# Altium PCB MPD-200A.PcbDoc
Units mm, origin at the board's own origin, x right, y up, seen from the top; angles counter-clockwise.
Board outline 30 x 30 mm, 2 copper layers (Top Layer, Bottom Layer), stack 1.071 mm thick; 7 components, 0 nets, 30 pads, 0 vias.
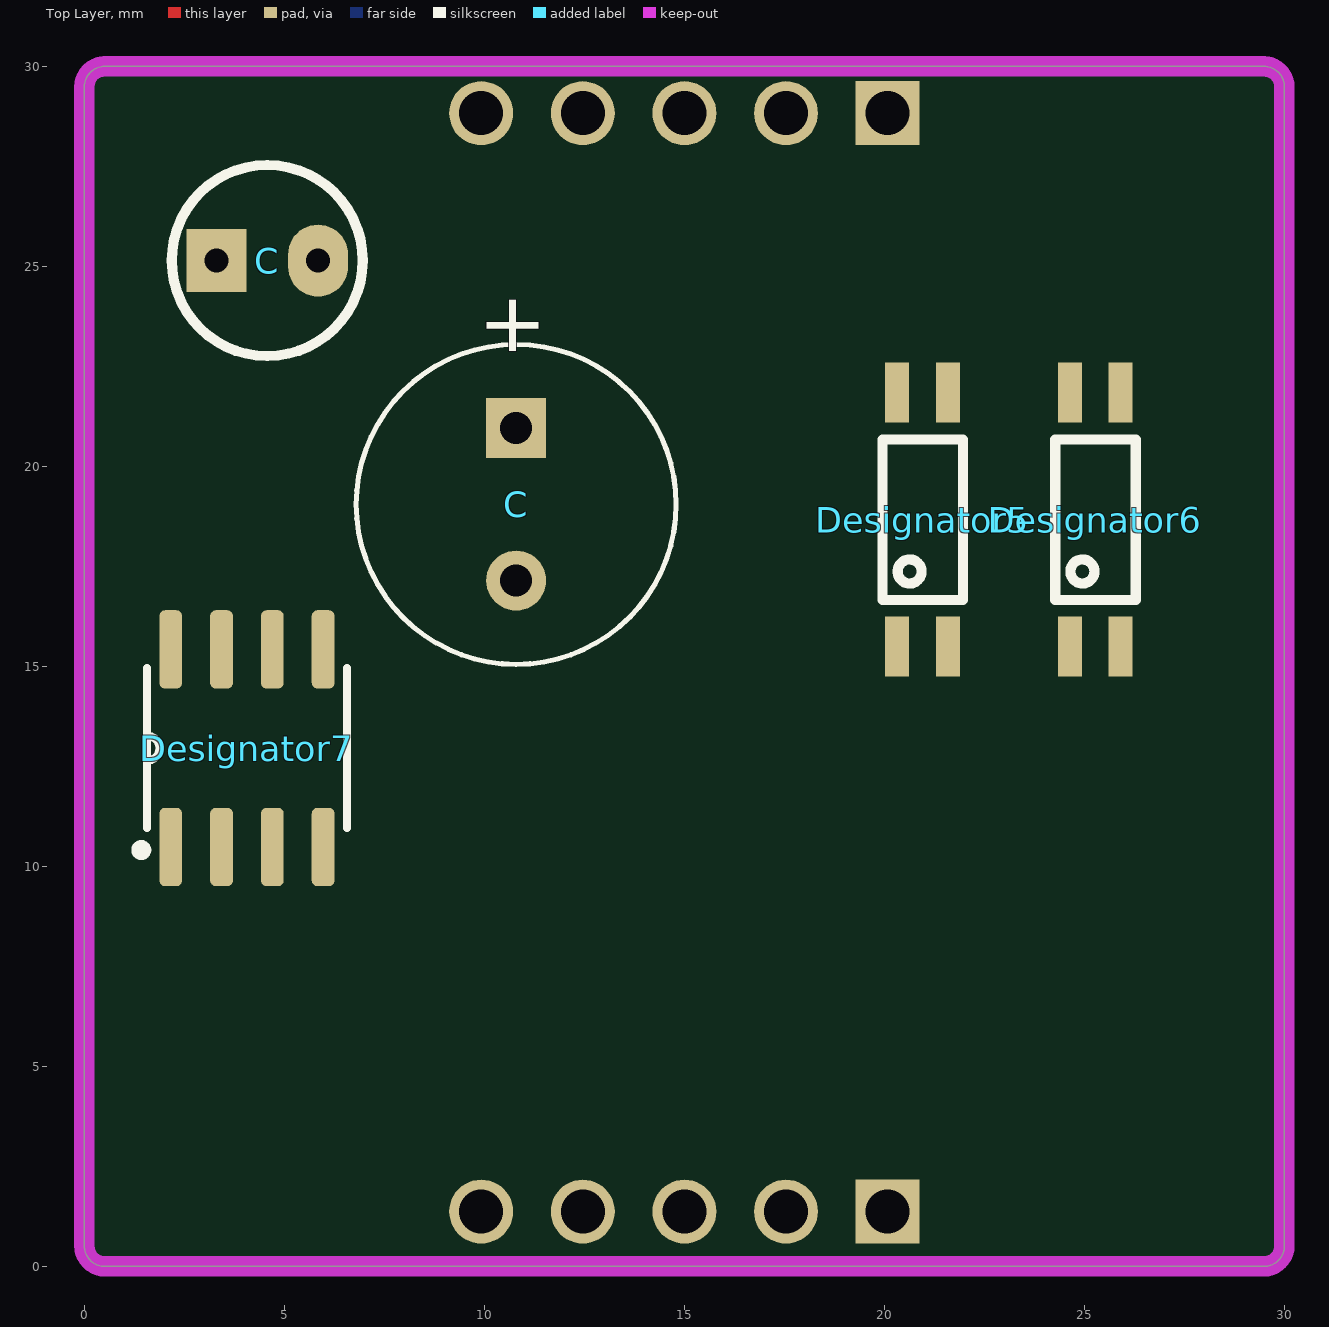
[diagram p0: Top Layer view]
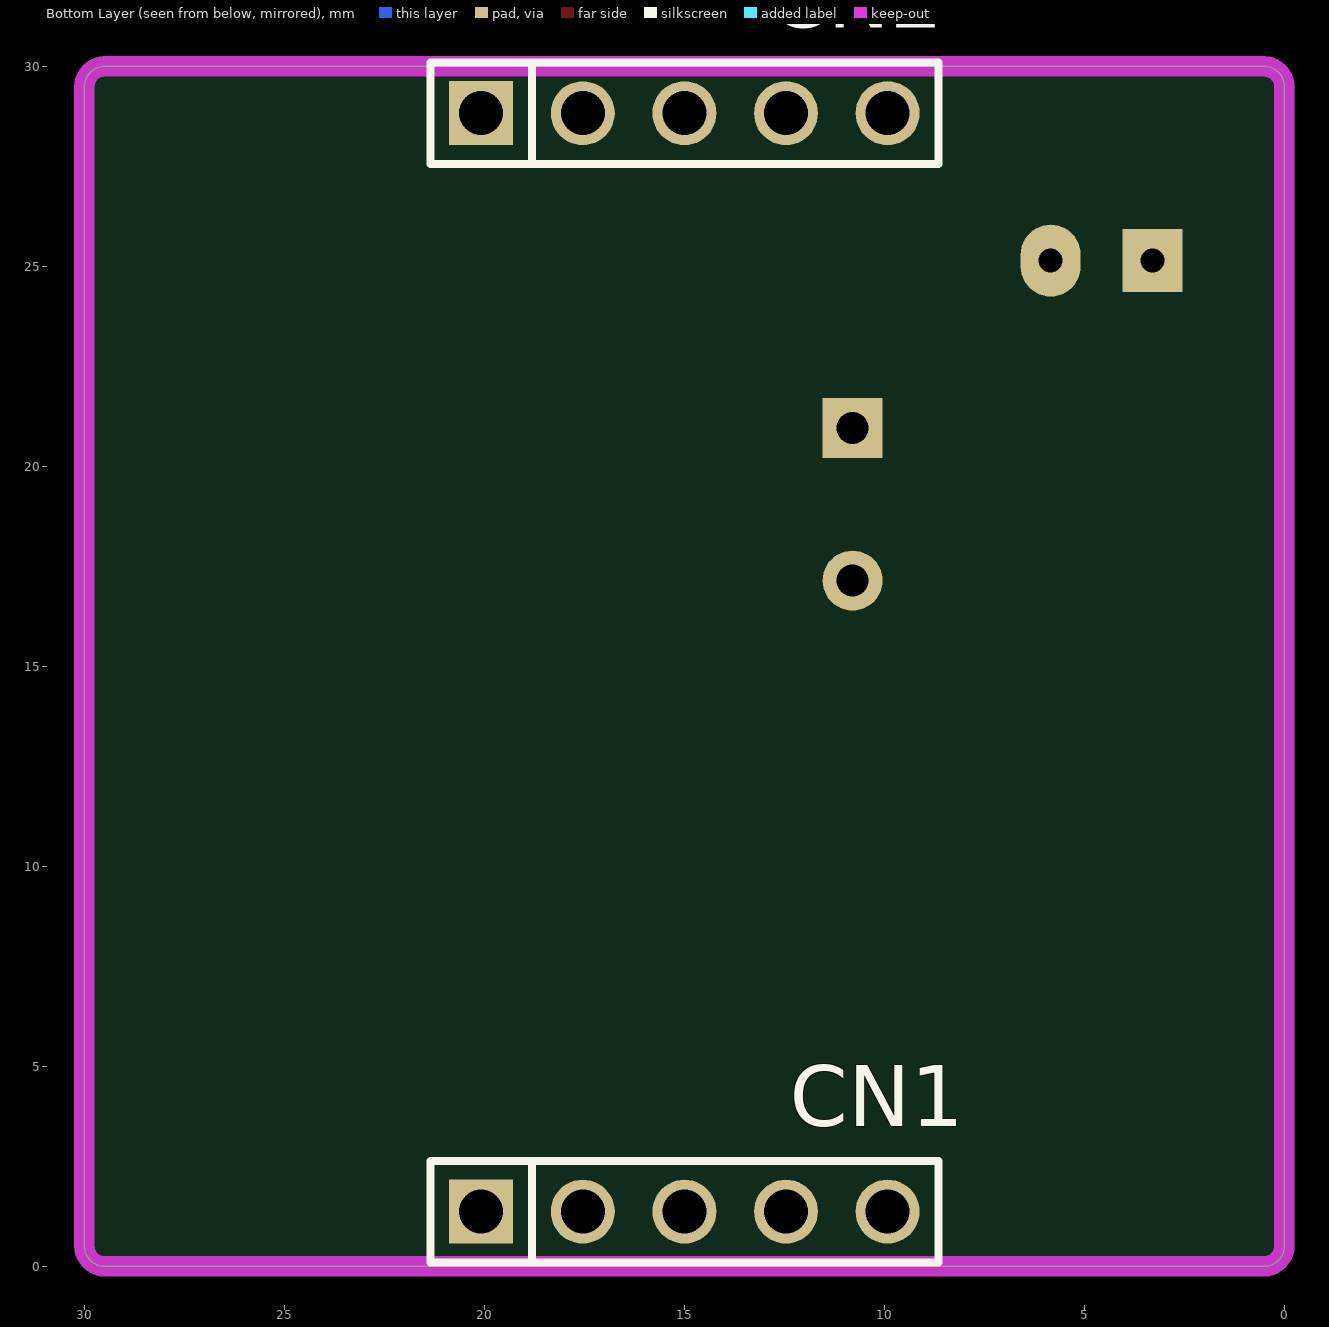
[diagram p1: Bottom Layer view, seen from below]

## Layer stack, top to bottom
Top Solder: solder mask 0.0102, Solder Resist, Dk 3.5
Top Layer: signal copper 0.0356
Dielectric 1: dielectric 1, FR-4, Dk 4.8
Bottom Layer: signal copper 0.0356
Bottom Solder: solder mask 0.0102, Solder Resist, Dk 3.5

## Board outline
0,0.508 0,29.492 cw(c0.508,29.492) 0.508,30 29.492,30 cw(c29.492,29.492) 30,29.492 30,0.508 cw(c29.492,0.508) 29.492,0 0.508,0 cw(c0.508,0.508)

## Design rules (kind name [scope] priority, off if disabled: settings)
Clearance [All] p1: gap=0.254 ignorepadtopadclearanceinfootprint=FALSE
PolygonConnect [All] p1: connectstyle=Relief reliefconductorwidth=0.254 reliefentries=4 polygonreliefangle="90 Angle" airgapwidth=0.254
RoutingVias [All] p1: holewidth=0.711 width=1.27 viastyle="Through Hole" minholewidth=0.711 minwidth=1.27 maxholewidth=0.711 maxwidth=1.27
SolderMaskExpansion [All] p1: expansion=0.102 istentingtop=FALSE
Width [All] p1: maxlimit=0.254 minlimit=0.254 preferedwidth=0.254
30 further rules are at their usual default settings.

## Components (designator, comment, footprint, x,y, rotation, side; value= is the part's Value field where it differs from the comment)
C "Comment" CA-ALU-2.54 4.572,25.146 r0 top
C "Comment" CA-ALU-8 10.795,19.05 r270 top
CN1 "Comment" JP5-D1T 20.08,1.37 r180 bottom
CN2 "Comment" JP5-D1T 20.08,28.83 r180 bottom
Designator5 "Comment" EL3H7 20.955,18.669 r90 top
Designator6 "Comment" EL3H7 25.273,18.669 r90 top
Designator7 "Comment" SOIC-8 4.064,12.954 r0 top

## Footprints (in the part's own frame and the unit in brackets; to place one, negate y for a bottom-side part, rotate by r counter-clockwise, add the part's x,y. Pads: shape width x height; smd on the part's side, far side on the other; paste and mask are expansions set on the pad)
CA-ALU-2.54 [mm]
  rect 1.5x1.58 hole 0.6: 1(-1.27,0)
  oval 1.5x1.8 hole 0.6: 2(1.27,0)
  silkscreen extent -2.39,-2.39 2.39,2.39, body extent -2,-2.03 1.99,1.97, height 7.01
CA-ALU-8 [mm] "Polarized capacitors, Aluminum Electrolytic Capacitors, 2-Leads, Body 8x16x3.5x0.5"
  rect 1.5x1.5 hole 0.8: 1(-1.905,0)
  round 1.5 hole 0.8: 2(1.905,0)
  silkscreen extent -4,-4 4,4, body extent -4.1,-4.1 4.1,4.1, height 14.4
EL3H7 [mm] "OPTO"
  rect 1.5x0.6 smd: A(-3.175,0.635) C(3.175,0.635) E(3.175,-0.635) K(-3.175,-0.635)
  silkscreen extent -2.01,-1.01 2,1, body extent -3.5,-1.3 3.5,1.3, height 2.02
JP5-D1T [mm] "5 pins, 1 row, straight, gold plating"
  rect 1.6x1.6 hole 1.1: 1(0,0)
  round 1.6 hole 1.1: 2(2.54,0) 3(5.08,0) 4(7.62,0) 5(10.16,0)
  silkscreen extent -1.27,-1.27 11.43,1.27, body extent -1.27,-1.27 11.43,1.27, height 8.54
SOIC-8 [mm] "SOIC-8"
  rrect49% 0.57x1.96 smd: 1(-1.905,-2.47) 2(-0.635,-2.47) 3(0.635,-2.47) 4(1.905,-2.47) 5(1.905,2.47) 6(0.635,2.47) 7(-0.635,2.47) 8(-1.905,2.47)
  silkscreen extent -2.77,-2.67 2.5,2, body extent -2.45,-3.08 2.45,2.92, height 1.63

## Nets (pads, with @x,y where several pads share a name; then routed paths per layer and width w, separated by ;. In a path a pad name is that pad's centre, name@x,y a point inside that pad or via, vN(x,y) a via of type N, cw(c..) or ccw(c..) an arc to the next point about the centre after c; other vN are vias at no path point)
pads on no net: C.1 C.2 CN1.1 CN1.2 CN1.3 CN1.4 CN1.5 CN2.1 CN2.2 CN2.3 CN2.4 CN2.5 Designator5.A Designator5.C Designator5.E Designator5.K Designator6.A Designator6.C Designator6.E Designator6.K Designator7.1 Designator7.2 Designator7.3 Designator7.4 Designator7.5 Designator7.6 Designator7.7 Designator7.8

## Keep-outs
Keep-Out Layer:
  the board outline again, w0.508

## Text inside footprints (layer, text, board x,y; h text height)
C: Top Overlay "+" at 10.058,24.375 h1.5 r270